# Altium PCB stm32_adis.PcbDoc
Units mil, origin at the board's own origin, x right, y up, seen from the top; angles counter-clockwise.
Board outline 2362.2 x 1968.5 mil, 2 copper layers (Top Layer, Bottom Layer); 29 components, 24 nets, 153 pads, 32 vias.
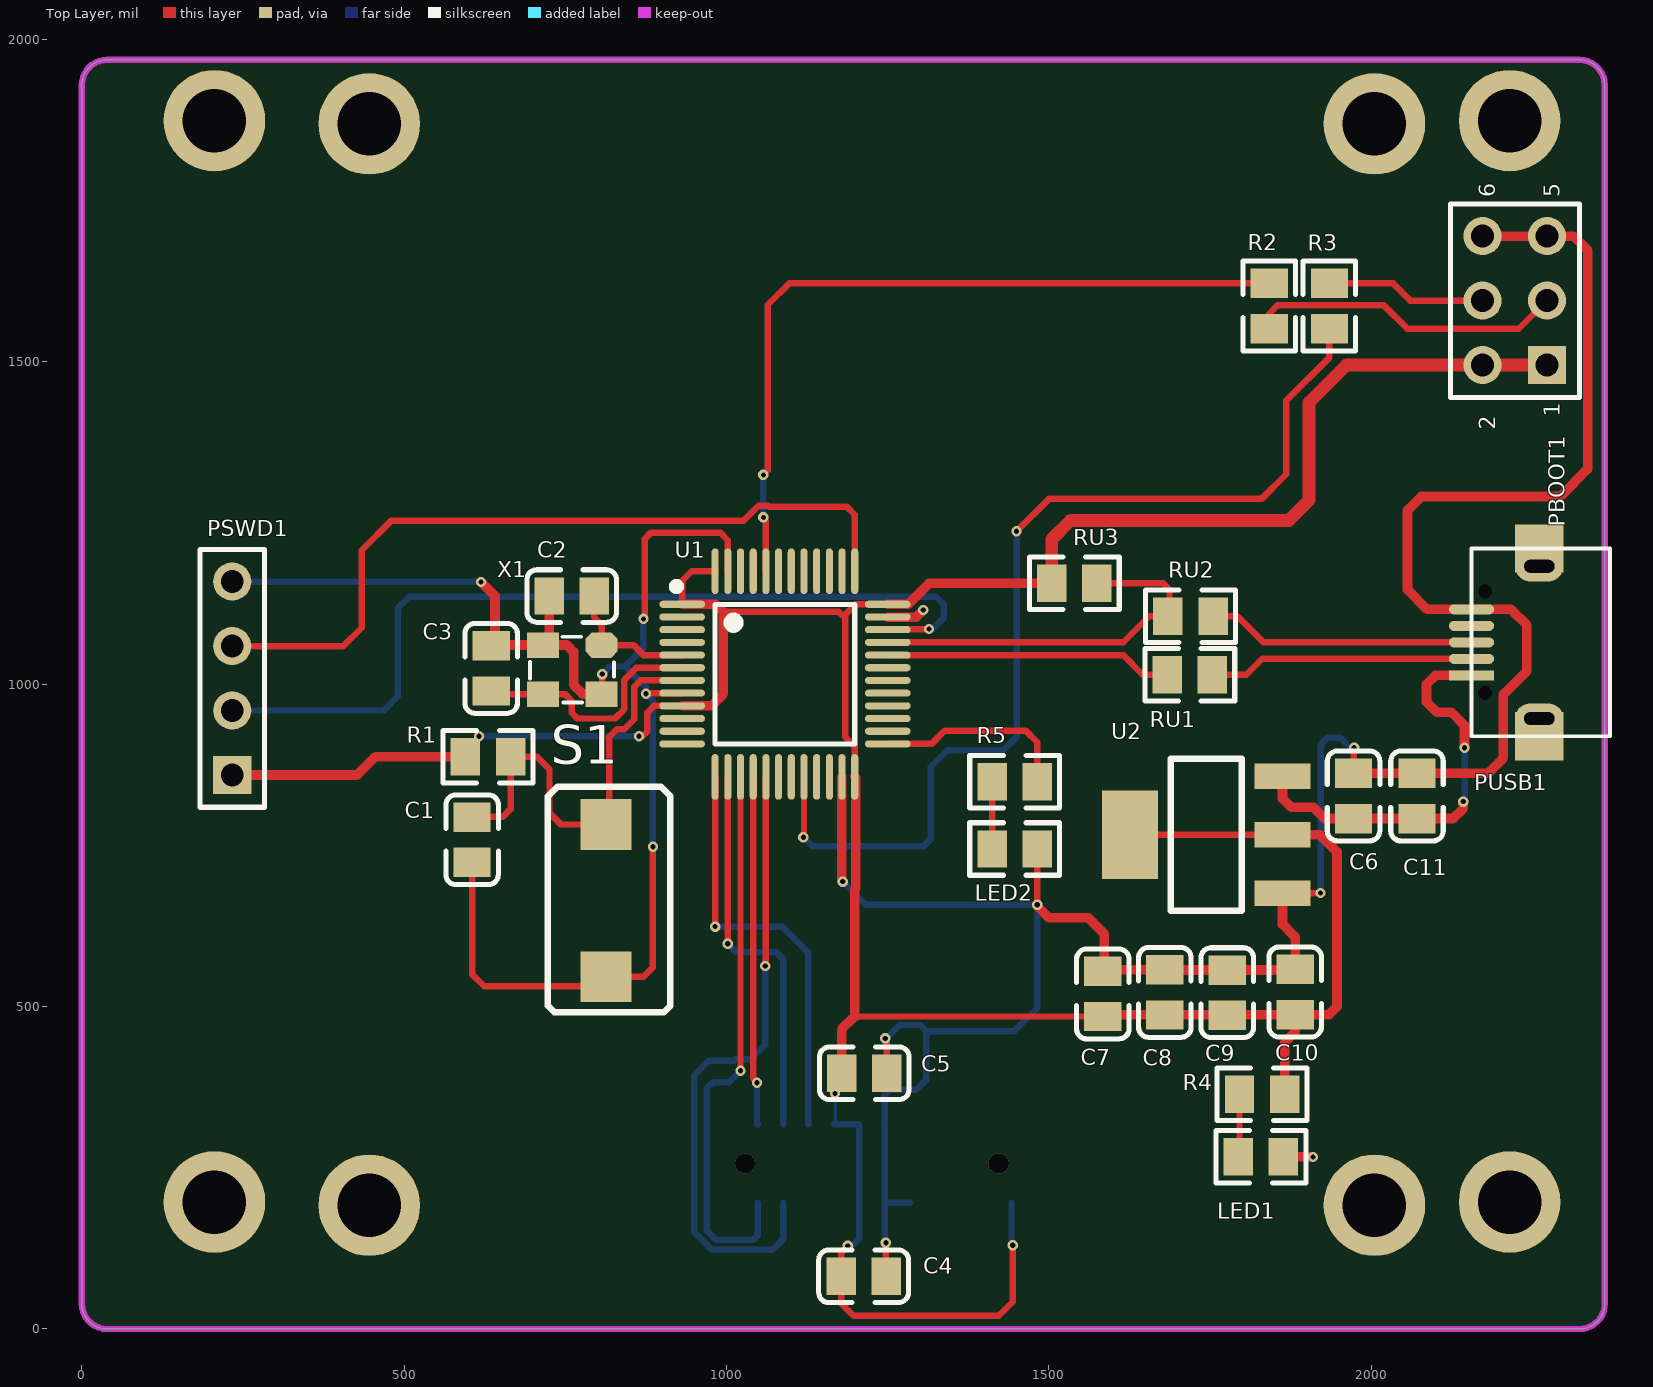
[diagram p0: Top Layer view]
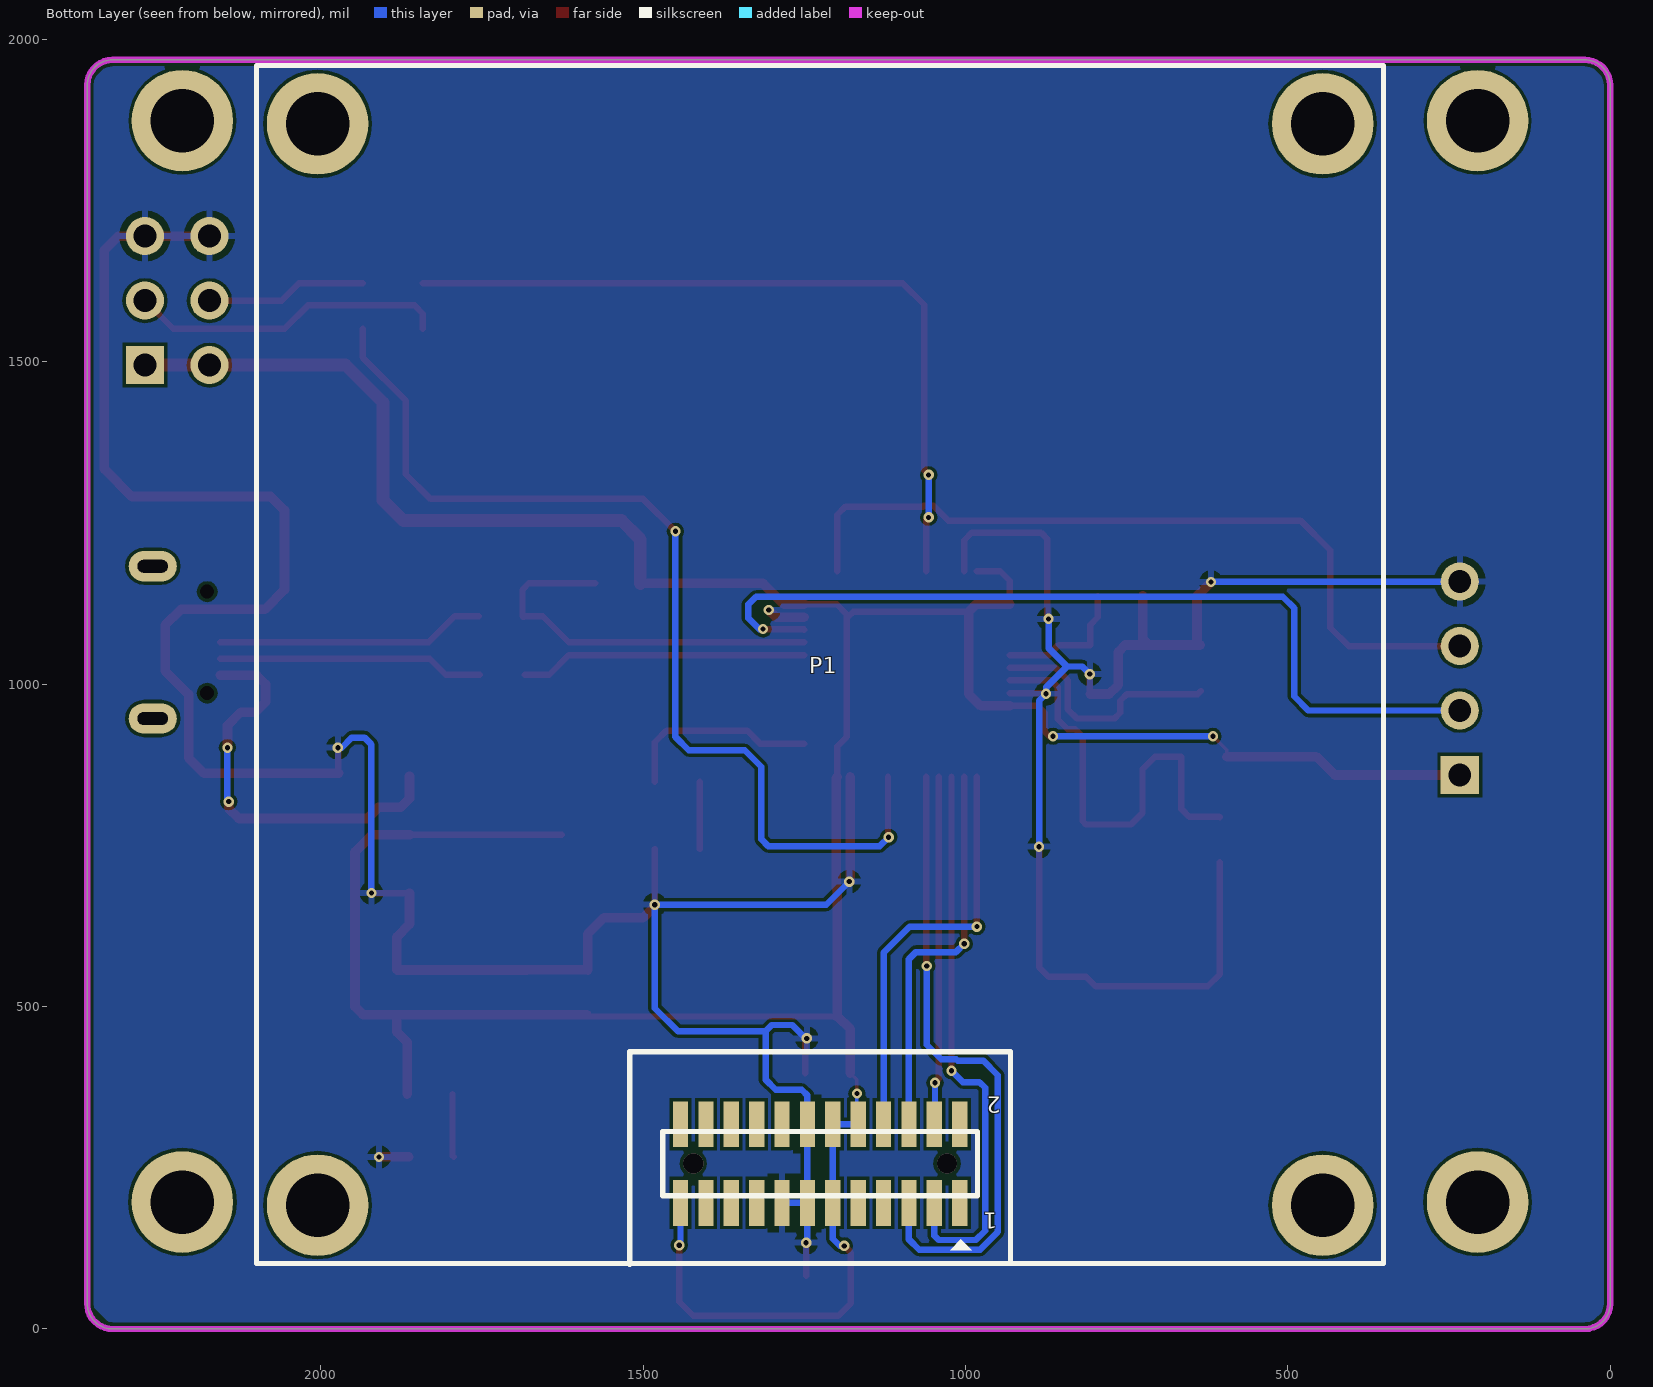
[diagram p1: Bottom Layer view, seen from below]
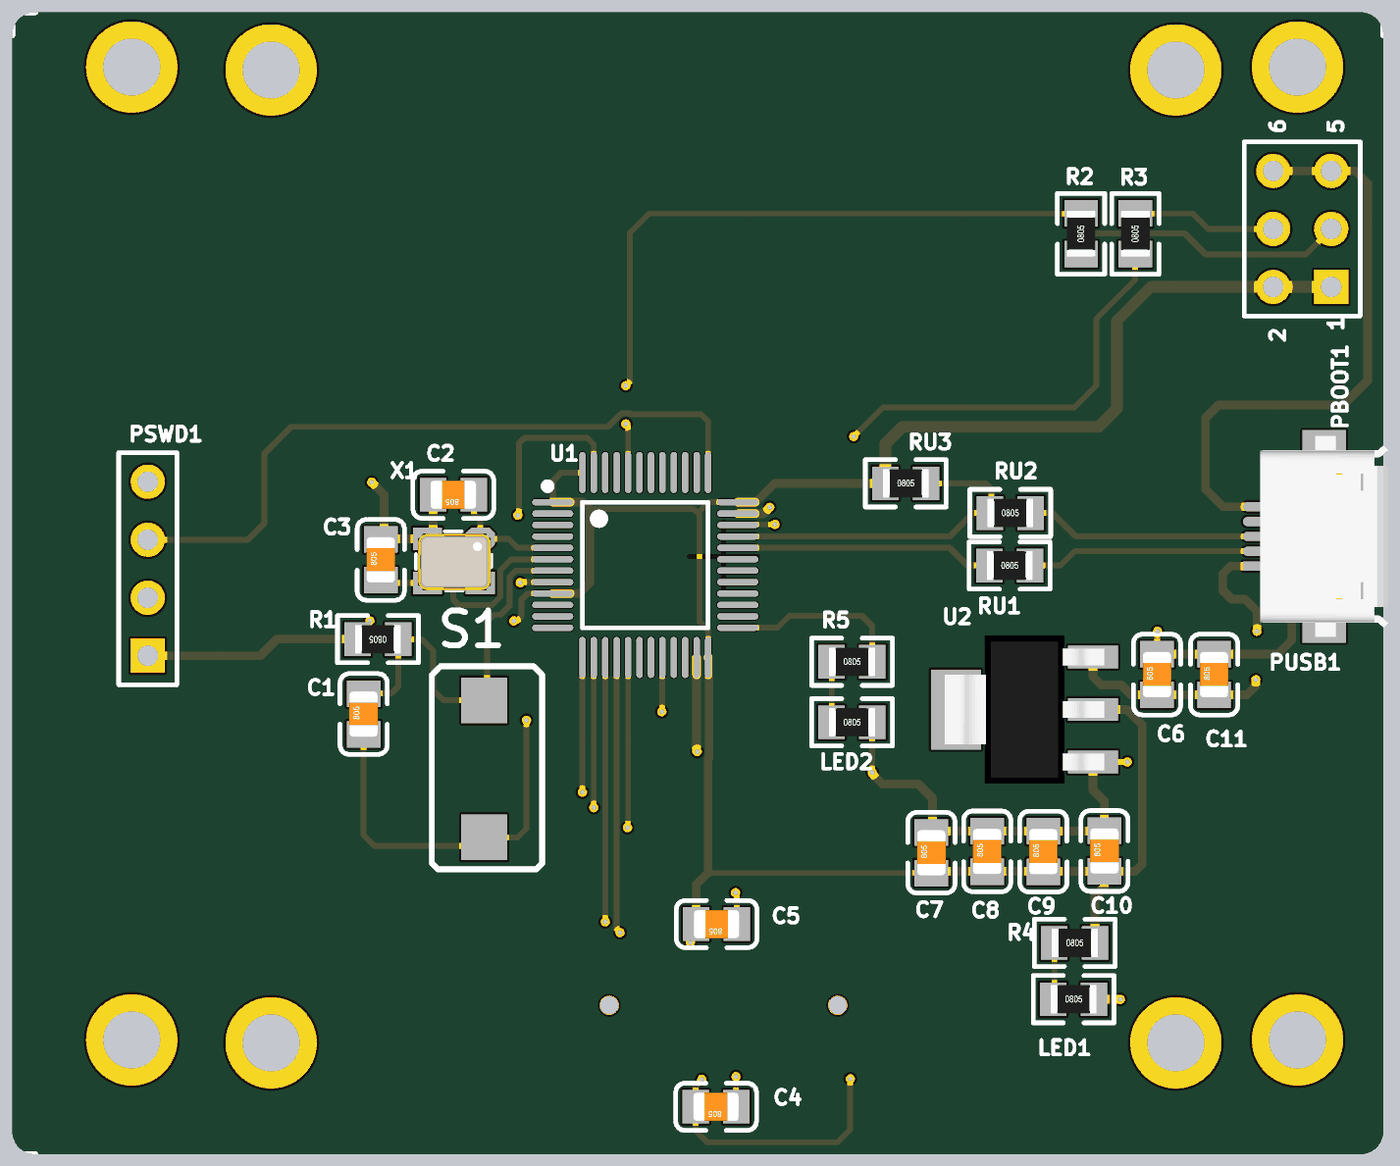
[diagram p2: 3D render of the assembled board from above, using the file's embedded part models]

## Layer stack, top to bottom
Top Layer: signal copper 1.4
Dielectric: dielectric 12.6, FR-4, Dk 4.8
Bottom Layer: signal copper 1.4

## Board outline
39.37,0 cw(c39.37,39.37) 0,39.21 0,39.37 0,1929.13 cw(c39.37,1929.13) 39.37,1968.5 2322.83,1968.5 cw(c2322.83,1929.13) 2362.2,1929.29 2362.2,1929.13 2362.2,39.37 cw(c2322.83,39.37) 2322.83,0

## Design rules (kind name [scope] priority, off if disabled: settings)
Clearance [All] p1: gap=5
ComponentClearance [All] p1: gap=2 collisioncheckmode=3 verticalgap=2 showdistances=FALSE
PolygonConnect [All] p1: connectstyle=Relief reliefconductorwidth=10 reliefentries=4 polygonreliefangle="90 Angle" airgapwidth=10
RoutingVias [All] p1: holewidth=8 width=16 viastyle="Through Hole" minholewidth=8 minwidth=16 maxholewidth=8 maxwidth=16
SolderMaskExpansion [All] p1: expansion=4
Width PWR [InNetClass('PWR')] p1: maxlimit=60 minlimit=5 preferedwidth=15
Width ALL [All] p2: maxlimit=10 minlimit=10 preferedwidth=10
27 further rules are at their usual default settings.

## Classes and differential pairs
net class PWR: 3.3V +5V GND

## Components (designator, comment, footprint, x,y, rotation, side; value= is the part's Value field where it differs from the comment)
C1 "104" 0805_C 605.32,758.86 r90 top
C2 "20P" 0805_C 759.84,1136.81 r180 top
C3 "20P" 0805_C 634.84,1024.61 r90 top
C4 "10uF/6V3" 0805_C 1212.6,81.69 r180 top
C5 "10uF/6V3" 0805_C 1213.58,396.65 r180 top
C6 "0.1uF" 0805_C 1972.44,826.77 r90 top
C7 "10uf" 0805_C 1583.66,519.69 r90 top
C8 "0.1uF" 0805_C 1679.84,522.06 r90 top
C9 "0.1uF" 0805_C 1776.57,521.65 r90 top
C10 "0.1uF" 0805_C 1881.89,522.64 r90 top
C11 "10uf" 0805_C 2070.87,826.77 r90 top
LED1 "LEDR" 0805_R 1828.74,267.13 r0 top
LED2 "LEDR" 0805_R 1446.85,744.49 r0 top
P1 "ADIS16488A" ADIS16488A 1225.39,1030.51 r180 bottom
PBOOT1 "Header 3X2" HDR2X3 2272.64,1495.08 r90 top
PSWD1 "Header 4" HDR1X4 233.27,859.25 r90 top
PUSB1 "MINIUSB" USB_Micro 2155.51,1064.96 r90 top
R1 "100K" 0805_R 629.92,887.8 r180 top
R2 "100K" 0805_R 1841.54,1586.61 r90 top
R3 "100K" 0805_R 1935.04,1586.61 r90 top
R4 "1K" 0805_R 1830.62,364.25 r0 top
R5 "1K" 0805_R 1446.85,848.82 r0 top
RU1 "22R" 0805_R 1718.5,1014.76 r0 top
RU2 "22R" 0805_R 1719.49,1105.31 r0 top
RU3 "10K" 0805_R 1539.37,1156.5 r0 top
S1 "SW-SPST" KEY_SMT 812.99,546.26 r0 top
U1 "STM32F103CXX" LQFP-48_7x7x05P 1090.55,1015.75 r270 top
U2 "AS1117" SOT-223 1744.09,766.54 r0 top
X1 "8M" 3225-XTAL 761.81,1022.64 r180 top

## Footprints (in the part's own frame and the unit in brackets; to place one, negate y for a bottom-side part, rotate by r counter-clockwise, add the part's x,y. Pads: shape width x height; smd on the part's side, far side on the other; paste and mask are expansions set on the pad)
0805_C [mm]
  rect 1.16x1.47 smd: 1(-0.89,0) 2(0.89,0)
  silkscreen extent -1.77,-1.04 1.77,1.04, body extent -1,-0.62 1,0.63, height 0.77
0805_R [mm]
  rect 1.16x1.47 smd: 1(-0.89,0) 2(0.89,0)
  silkscreen extent -1.77,-1.04 1.77,1.03, body extent -1,-0.62 1,0.63, height 0.49
3225-XTAL [mm]
  oct 1.27x1 smd: 1(-1.127,-0.968)
  rect 1.27x1 smd: 2(1.184,-0.968) 3(1.184,0.962) 4(-1.127,0.962)
  silkscreen extent -1.61,-1.3 1.69,1.29, body extent -1.6,-1.21 1.6,1.29, height 0.61
ADIS16488A [mm]
  rect 0.6x1.8 smd: 1(5.5,-21.209) 2(5.5,-18.107) 3(4.5,-21.209) 4(4.5,-18.107) 5(3.5,-21.209) 6(3.5,-18.107) 7(2.5,-21.209) 8(2.5,-18.107) 9(1.5,-21.209) 10(1.5,-18.107) 11(0.5,-21.209) 12(0.5,-18.107) 13(-0.5,-21.209) 14(-0.5,-18.107) 15(-1.5,-21.209) 16(-1.5,-18.107) 17(-2.5,-21.209) 18(-2.5,-18.107) 19(-3.5,-21.209) 20(-3.5,-18.107) 21(-4.5,-21.209) 22(-4.5,-18.107) 23(-5.5,-21.209) 24(-5.5,-18.107)
  round 4 hole 2.5: null(-19.8,-21.3) null(-19.8,21.3) null(19.8,-21.3) null(19.8,21.3)
  silkscreen extent -22.2,-23.62 22.2,23.6
HDR1X4 [mm] "Connector; Header; 4 Position"
  rect 1.5x1.5 hole 0.9: 1(0,0)
  round 1.5 hole 0.9: 2(2.54,0) 3(5.08,0) 4(7.62,0)
  silkscreen extent -1.27,-1.27 8.89,1.27
HDR2X3 [mm] "Connector; Header; 3x2 Position"
  rect 1.5x1.5 hole 0.9: 1(0,0)
  round 1.5 hole 0.9: 2(0,2.54) 3(2.54,0) 4(2.54,2.54) 5(5.08,0) 6(5.08,2.54)
  silkscreen extent -1.27,-1.27 6.35,3.81
KEY_SMT [mm]
  rect 2x2 smd: 1(0,0) 2(0,6)
  silkscreen extent -2.29,-1.4 2.54,7.49
LQFP-48_7x7x05P [mm]
  oval 0.28x1.8 smd mask+0.051: 1(-2.75,-4.05) 2(-2.25,-4.05) 3(-1.75,-4.05) 4(-1.25,-4.05) 5(-0.75,-4.05) 6(-0.25,-4.05) 7(0.25,-4.05) 8(0.75,-4.05) 9(1.25,-4.05) 10(1.75,-4.05) 11(2.25,-4.05) 12(2.75,-4.05) 25(2.75,4.05) 26(2.25,4.05) 27(1.75,4.05) 28(1.25,4.05) 29(0.75,4.05) 30(0.25,4.05) 31(-0.25,4.05) 32(-0.75,4.05) 33(-1.25,4.05) 34(-1.75,4.05) 35(-2.25,4.05) 36(-2.75,4.05)
  oval 1.8x0.28 smd mask+0.051: 13(4.05,-2.75) 14(4.05,-2.25) 15(4.05,-1.75) 16(4.05,-1.25) 17(4.05,-0.75) 18(4.05,-0.25) 19(4.05,0.25) 20(4.05,0.75) 21(4.05,1.25) 22(4.05,1.75) 23(4.05,2.25) 24(4.05,2.75) 37(-4.05,2.75) 38(-4.05,2.25) 39(-4.05,1.75) 40(-4.05,1.25) 41(-4.05,0.75) 42(-4.05,0.25) 43(-4.05,-0.25) 44(-4.05,-0.75) 45(-4.05,-1.25) 46(-4.05,-1.75) 47(-4.05,-2.25) 48(-4.05,-2.75)
  silkscreen extent -3.6,-4.42 2.75,2.75
SOT-223 [mm]
  rect 2.2x1 smd: 1(3,-2.3) 2(3,0) 3(3,2.3)
  rect 2.2x3.5 smd: 2(-3,0)
  silkscreen extent -1.4,-3 1.4,3, body extent -3.49,-3.24 3.49,3.24, height 1.64
USB_Micro [mm]
  rect 1.9x1.9 smd: 0(-3.7,-2.667) 0(3.7,-2.667)
  oval 1.2x1.9 hole 0.5 slot 1.2 at 90 deg: 0(-3,-2.667) 0(3,-2.667)
  rect 0.4x1.778 smd: 1(-1.3,0)
  oval 0.4x1.778 smd: 2(-0.65,0) 3(0,0) 4(0.65,0) 5(1.3,0)
  round 0.3 hole 0.55 unplated: H1(-2,-0.525) H1(2,-0.525)
  silkscreen extent -3.7,-5.46 3.7,0, body extent -4.4,-5.47 4.4,0.13, height 2.74

## Part data
C1 C2 C3 C4 C5: library part "Cap Cer", "Ceramic Capacitor"
C6 C7 C8 C9 C10 C11: library part CAP, "Capacitor"
LED1 LED2: library part LED
P1: "Header, 12-Pin, Dual row"
PBOOT1: "Header, 3-Pin, Dual row"
PSWD1: "Header, 4-Pin"
R1 R2 R3 R4 R5: library part Res, "Resistor"
RU1 RU2 RU3: library part RES2
S1: "Single-Pole, Single-Throw Switch"
X1: library part Crystal, "Crystal"

## Free pads (board coordinates)
  round 157.48 hole 98.42: 0(205.71,196.93) 0(2214.57,196.93) 0(2214.57,1874.09) ""(205.71,1874.09)

## Via types
v1: diameter 16, hole 8, Top Layer to Bottom Layer, 30 vias
v2: diameter 31.5, hole 31.5, Top Layer to Bottom Layer, 2 vias

## Nets (pads, with @x,y where several pads share a name; then routed paths per layer and width w, separated by ;. In a path a pad name is that pad's centre, name@x,y a point inside that pad or via, vN(x,y) a via of type N, cw(c..) or ccw(c..) an arc to the next point about the centre after c; other vN are vias at no path point)
3.3V: C4.2 C5.2 C7.1 C8.1 C9.1 C10.1 P1.10 P1.11 P1.12 P1.23 PBOOT1.1 PBOOT1.2 PSWD1.1 R1.2 R4.2 RU3.1 U1.1 U1.9 U1.24 U1.36 U1.48 U2.2 | length 5708.6
  Top Layer w5.5: R1.2 594.88,898.03 v1(616.14,919.29) ; v1(1168.31,365.16) 1168.31,386.42 C5.2
  Top Layer w10: v1@870.08,919.29 876.97,926.18 876.97,955.71 887.8,966.54 U1.9 ; U1.1 931.1,1160.43 945.87,1175.2 U1.48 ; 995.08,1112.2 1174.21,1112.2 1181.1,1105.31 1184.06,1108.27 ; v1(1187.99,128.94) 1177.56,118.5 C4.2 1177.56,39.96 1196.85,20.67 1422.24,20.67 1443.9,42.32 v1(1443.9,129.92) ; 1198.82,485.24 1199.41,484.65 C7.1 ; U1.24 1198.82,903.54 1184.06,918.31 1184.06,1108.27 ; U1.36 1199.8,1124.02 1184.06,1108.27 ; U2.2@1625.98,766.54 U2.2@1862.2,766.54
  Top Layer w15: PSWD1.1@241.14,859.25 427.17,859.25 455.71,887.8 R1.2 ; U1.9 976.38,966.54 995.08,985.24 995.08,1112.2 983.27,1124.02 U1.1 ; C5.2 1178.54,464.96 1198.23,484.65 1199.41,484.65 ; 1198.82,485.24 1198.82,681.81 1200.62,683.61 1200.62,854.5 U1.24 ; U1.36 1281.5,1124.02 1313.98,1156.5 RU3.1 ; C7.1@1586.61,487.6 C10.1 ; U2.2@1862.2,766.54 1920.47,766.54 1946.85,740.16 1946.85,500 1934.45,487.6 C10.1 ; R4.2 1865.66,444.4 1881.89,460.63 C10.1
  Top Layer w20: RU3.1 1504.33,1224.8 1533.46,1253.94 1872.05,1253.94 1903.54,1285.43 1903.54,1437.01 1961.61,1495.08 PBOOT1.2 PBOOT1.1
  Bottom Layer w5.5: P1.10 1168.31,319.6 v1(1168.31,365.16)
  Bottom Layer w10: v1(616.14,919.29) v1(864.17,919.29) ; P1.10 P1.12 P1.11 1205.71,139.76 v1@1194.88,128.94 ; v1@1441.93,131.89 P1.23
+5V: C6.1 C11.1 PUSB1.1 U2.3 | length 638
  Top Layer w15: U2.3 1862.2,822.83 1875.98,809.06 1910.43,809.06 1927.76,791.73 C6.1 C11.1 2126.97,791.73 2142.72,807.48 v1(2142.72,817.91) ; v1(2144.69,901.57) 2144.69,936.02 2124.02,956.69 2101.38,956.69 2085.63,972.44 2085.63,1000 2099.41,1013.78 PUSB1.1
  Bottom Layer w10: v1@2144.69,819.88 v1(2144.69,901.57)
ADI_C\S\: P1.6 U1.14 | length 610.5
  Top Layer w10: v1(1001.97,597.44) U1.14
  Bottom Layer w10: v1(1001.97,597.44) 1014.76,584.65 1076.77,584.65 1087.6,573.82 P1.6
ADI_MISO: P1.4 U1.16 | length 541.5
  Top Layer w10: U1.16 1041.34,387.8 v1(1047.24,381.89)
  Bottom Layer w10: v1(1047.24,381.89) 1047.24,318.61 P1.4
ADI_MOSI: P1.5 U1.17 | length 1002.1
  Top Layer w5.5: v1@1061.02,562.01 v1@1061.02,562.99
  Top Layer w10: v1(1060.04,562.99) 1061.02,563.98 U1.17
  Bottom Layer w10: v1(1060.04,562.99) 1060.04,440.95 1037.69,418.59 1014.2,418.59 1011.95,416.34 972.44,416.34 949.8,393.7 949.8,150.59 977.36,123.03 1071.85,123.03 1087.6,138.78 P1.5
ADI_R\S\T\: P1.8 U1.13 | length 659.7
  Top Layer w10: v1(982.28,624.02) U1.13
  Bottom Layer w10: v1(982.28,624.02) 1086.61,624.02 1126.97,583.66 P1.8
ADI_SCLK: P1.3 U1.15 | length 878.5
  Top Layer w10: v1(1021.65,400.59) U1.15
  Bottom Layer w10: v1(1021.65,400.59) 1003.94,382.87 978.35,382.87 969.49,374.02 969.49,152.56 984.02,138.03 1041.34,138.03 1048.23,144.92 P1.3
BOOT0: R2.2 U1.44 | length 1209.1
  Top Layer w10: v1(1057.09,1258.86) 1061.02,1254.92 U1.44 ; v1(1057.09,1324.8) 1063.98,1331.69 1063.98,1588.58 1097.05,1621.65 R2.2
  Bottom Layer w10: v1(1057.09,1258.86) v1(1057.09,1324.8)
BOOT1: R3.1 U1.20 | length 1593.6
  Top Layer w10: v1(1119.09,762.8) 1120.08,763.78 U1.20 ; v1(1449.8,1237.2) 1500,1287.4 1829.72,1287.4 1868.11,1325.79 1868.11,1439.96 1935.04,1506.89 R3.1
  Bottom Layer w10: v1(1119.09,762.8) 1132.87,749.02 1306.1,749.02 1316.93,759.84 1316.93,872.05 1342.52,897.64 1429.13,897.64 1449.8,918.31 v1(1449.8,1237.2)
GND: C1.1 C2.2 C3.2 C4.1 C5.1 C6.2 C7.2 C8.2 C9.2 C10.2 C11.2 LED1.2 LED2.2 P1.13 P1.14 P1.15 PBOOT1.5 PBOOT1.6 PSWD1.4 PUSB1.5 S1.1 U1.8 U1.23 U1.35 U1.47 U2.1 X1.2 X1.4 | length 6503.8
  Top Layer w10: C1.1 605.32,550.2 624.02,531.5 798.23,531.5 S1.1 871.06,546.26 885.83,561.02 v1(885.83,748.03) ; C3.2 C3.2@635.96,1060.76 ; X1.4 807.09,985.66 v1(807.09,1015.75) ; v1(871.06,1101.38) 873.03,1103.35 873.03,1225.39 882.87,1235.24 990.16,1235.24 1001.97,1223.43 U1.47 ; v1(875,985.24) 875.98,986.22 U1.8 ; C4.1@1247.05,82.28 v1(1247.05,133.86) ; C5.1 v1@1248.62,448.23 ; v1@1481.89,655.91 v1(1481.89,658.07) LED2.2 ; U2.1 1862.4,676.18 v1(1921.26,676.18) ; C6.2 v1@1972.44,900.59
  Top Layer w15: v1(619.09,1158.46) 640.75,1136.81 C3.2@640.75,1065.55 ; C3.2@635.96,1060.76 X1.2 ; C2.2 724.8,1070.38 X1.2 ; X1.4 777.05,984.76 762.8,999.02 762.8,1050.2 752.23,1060.76 X1.2 ; U1.23@1178.82,856.3 1178.82,695.2 v1(1180.12,693.9) ; U1.35@1250,1104.02 1293.98,1104.02 v1(1305.12,1115.16) ; v1@1481.89,655.91 1500,637.8 1561.02,637.8 1585.63,613.19 1585.63,556.69 1586.03,557.09 C8.2 1680.24,556.69 C9.2 1880.91,556.69 C10.2 1881.89,608.27 1862.2,627.95 U2.1 ; LED1.2 v1@1909.05,267.13 ; C6.2 C11.2 2180.71,861.81 2204.72,885.83 2204.72,984.25 2241.14,1020.67 2241.14,1091.54 2216.54,1116.14 PUSB1.5 2086.61,1116.14 2056.1,1146.65 2056.1,1269.69 2077.76,1291.34 2293.31,1291.34 2335.63,1333.66 2335.63,1673.23 2313.78,1695.08 PBOOT1.5 PBOOT1.6
  Bottom Layer w5.5: P1.14 P1.14@1245.08,322.83
  Bottom Layer w10: PSWD1.4 v1@618.31,1159.25 ; v1(807.09,1015.75) 818.9,1027.56 842.52,1027.56 ; v1(871.06,1101.38) 871.06,1056.1 842.52,1027.56 ; v1(885.83,748.03) 885.83,974.41 v1(875,985.24) 875,995.08 842.52,1027.56 ; v1(1180.12,693.9) 1215.95,658.07 v1(1481.89,658.07) 1481.89,497.64 1445.87,461.61 1310.04,461.61 ; v1@1245.08,135.83 P1.13 ; P1.14 P1.13 ; P1.14@1245.08,322.83 1245.08,362.2 1253.94,371.06 1294.29,371.06 1310.04,386.81 1310.04,461.61 ; v1(1246.06,450.79) 1248.03,450.79 1268.7,471.46 1300.2,471.46 1310.04,461.61 ; P1.15 P1.13 ; v1(1921.26,676.18) 1921.26,906.5 1932.09,917.32 1951.77,917.32 1967.52,901.57 v1(1973.43,901.57)
  other v1: 1909.45,266.73
NetLED1_1: LED1.1 R4.1 | length 97.9
  Top Layer w10: LED1.1 1795.58,269.01 R4.1
NetLED2_1: LED2.1 R5.1 | length 104.3
  Top Layer w10: LED2.1 R5.1
NetPBOOT1_3: PBOOT1.3 R2.1 | length 492.9
  Top Layer w10: R2.1 1841.54,1574.8 1854.33,1587.6 2019.69,1587.6 2056.1,1551.18 2228.74,1551.18 PBOOT1.3
NetPBOOT1_4: PBOOT1.4 R3.2 | length 248.6
  Top Layer w10: R3.2 2033.86,1621.65 2060.43,1595.08 PBOOT1.4
NetPUSB1_2: PUSB1.2 RU1.2 | length 412.2
  Top Layer w10: RU1.2 1806.1,1014.76 1830.71,1039.37 PUSB1.2
NetPUSB1_3: PUSB1.3 RU2.2 | length 417.7
  Top Layer w10: RU2.2 1792.32,1105.31 1832.68,1064.96 PUSB1.3
NetRU1_1: RU1.1 U1.32 | length 446.1
  Top Layer w10: U1.32 1615.16,1045.28 1645.67,1014.76 RU1.1
NetRU2_1: RU2.1 RU3.2 U1.33 | length 612.1
  Top Layer w10: U1.33 1615.16,1064.96 1655.51,1105.31 RU2.1 ; RU3.2 1677.17,1156.5 1687.01,1146.65 1687.01,1105.31 1686.02,1104.33 RU2.1@1684.45,1104.33
NRST: C1.2 R1.1 S1.2 U1.7 | length 694.3
  Top Layer w10: C1.2 606.1,794.68 653.15,794.68 664.96,806.5 R1.1 705.71,887.8 725.39,868.11 725.39,800.2 743.11,782.48 S1.2 817.91,787.4 817.91,918.31 829.72,930.12 841.54,930.12 857,945.58 857,995.78 867.13,1005.91 U1.7
OSC1: C2.1 U1.5 X1.1 | length 212.1
  Top Layer w10: C2.1 794.88,1103.74 806.19,1092.44 X1.1 855.57,1060.76 871.06,1045.28 U1.5
OSC2: C3.1 U1.6 X1.3 | length 384.2
  Top Layer w10: C3.1 639.65,984.76 X1.3 749.49,984.76 759.84,974.41 759.84,955.71 768.7,946.85 827.1,946.85 841.19,960.94 841.19,972.34 841.19,995.14 841.19,1006.54 860.24,1025.59 U1.6
PB12: R5.2 U1.25 | length 309.1
  Top Layer w10: U1.25 1317.91,907.48 1338.58,928.15 1463.58,928.15 1481.89,909.84 R5.2
SWCLK: PSWD1.3 U1.37 | length 1219.5
  Top Layer w10: PSWD1.3 405.71,1059.25 434.06,1087.6 434.06,1207.68 480.31,1253.94 1026.71,1253.94 1049.63,1276.86 1064.54,1276.86 1065.81,1275.59 1186.02,1275.59 1198.82,1262.8 U1.37
SWIO: PSWD1.2 U1.34 | length 1377.1
  Top Layer w10: U1.34 1250.98,1085.63 v1(1313.98,1085.63)
  Bottom Layer w10: PSWD1.2 468.11,959.25 490.16,981.3 490.16,1118.11 507.87,1135.83 1324.8,1135.83 1336.61,1124.02 1336.61,1102.36 1319.88,1085.63 v1(1313.98,1085.63)
pads on no net: P1.1 P1.2 P1.7 P1.9 P1.16 P1.17 P1.18 P1.19 P1.20 P1.21 P1.22 P1.24 P1.null PUSB1.0 PUSB1.4 PUSB1.H1 U1.2 U1.3 U1.4 U1.10 U1.11 U1.12 U1.18 U1.19 U1.21 U1.22 U1.26 U1.27 U1.28 U1.29 U1.30 U1.31 U1.38 U1.39 U1.40 U1.41 U1.42 U1.43 U1.45 U1.46
copper on no net:
  other v2: 1028.54,256.57 1422.24,256.57

## Polygon pours and split planes (outlines as drawn)
GND on Bottom Layer "Bottom Layer-No Net" (solid, pour order 8): 39.37,1968.5 0,1929.13 0,39.21 30.35,8.86 41.34,8.86 2326.77,8.86 2330.71,12.8 2359.25,41.34 2362.2,41.34 2362.2,1929.13 2326.77,1964.57 2301.18,1964.57 43.31,1964.57 39.37,1968.5

## Keep-outs
Keep-Out Layer:
  lines w10: 0,39.21 ccw(c39.37,39.37) 39.37,0 2322.83,0 ccw(c2322.83,39.37) 2362.2,39.37 2362.2,1929.13 ; 0,39.37 0,1929.13 cw(c39.37,1929.13) 39.37,1968.5 2322.83,1968.5 cw(c2322.83,1929.13) 2362.2,1929.29

## Dimensions
39.37,1968.5 to 39.37,0 on Top Overlay
0,1929.13 to 2362.2,1929.13 on Top Overlay

## Text inside footprints (layer, text, board x,y; h text height)
P1: Bottom Overlay "1" at 950.39,180.51 h25 r180; Bottom Overlay "2" at 945.39,360.51 h25 r180
PBOOT1: Top Overlay "1" at 2292.64,1415.08 h25 r90; Top Overlay "2" at 2192.64,1395.08 h25 r90; Top Overlay "5" at 2292.64,1755.08 h25 r90; Top Overlay "6" at 2192.64,1755.08 h25 r90